# EAGLE board highpass filter (EAGLE 5.00)

Size 160 x 100 mm. Coordinates in mm from the lower left corner, seen from the top.
Outline: 0,0 160,0 160,100 0,100 0,0
Copper layers (1*16): Top 0.035mm / dielectric 1.5mm / Bottom 0.035mm
Design rules "default": minimum track width 10mil, minimum drill 24mil, track to track 8mil, track to pad 8mil, pad to pad 8mil, via to via 8mil, smd to smd 8mil, copper to edge 40mil, drill to drill 8mil, minimum pad ring 10mil, minimum via ring 8mil, stop-mask expansion 4mil, vias tented up to drill 0mil, thermal gap 10mil

## Footprints (pad centres in the part's own frame; a part is rotated, then mirrored left to right if it is on the bottom)
BATTCOM_20MM_PTH = drill 1.3 round: 1 20,0; 2 0,0
C050-030X075 = drill 0.813 octagon: 1 -2.54,0; 2 2.54,0
LED5MM = drill 0.813 pad 1.88 round: A -1.27,0; K 1.27,0
0204/7 = drill 0.813 octagon: 1 -3.81,0; 2 3.81,0
RTRIM3339P = drill 0.61 round: 1 -2.54,0; 2 0,-2.54; 3 2.54,0
TO92 = drill 0.813 octagon: 1 1.27,0; 2 0,1.905; 3 -1.27,0
DIODE-ZENER = drill 0.9 round: P$1 -3.556,0; P$2 3.556,0

## Placement (x,y rotation side)
BAT1  [BATTCOM_20MM_PTH]  -34.93,11.9 0 top  (outside the outline)
C1  [C050-030X075]  -37.47,24.6 0 top  (outside the outline)
C2  [C050-030X075]  -15.88,34.76 0 top  (outside the outline)
LED1  [LED5MM]  -29.85,27.14 0 top  (outside the outline)
R1  [0204/7]  -17.15,41.11 0 top  (outside the outline)
R2  [0204/7]  -27.31,41.11 0 top  (outside the outline)
R3  [0204/7]  -37.47,41.11 0 top  (outside the outline)
R4  [0204/7]  -17.15,44.92 0 top  (outside the outline)
R5  [0204/7]  -27.31,44.92 0 top  (outside the outline)
R6  [RTRIM3339P]  -17.15,27.14 0 top  (outside the outline)
T1  BC547  [TO92]  -29.85,36.03 0 top  (outside the outline)
T2  BC547  [TO92]  -42.55,36.03 0 top  (outside the outline)
U$2  DIODE-ZENERPTH  [DIODE-ZENER]  -37.47,44.92 0 top  (outside the outline)

## Library data of the parts
BAT1 LED1 U$2 = SparkFun
C1 C2 R6 = resistor
R1-R5 = rcl
T1 T2 = transistor

## Nets
N$1: C1.1
N$2: C1.2 C2.1 R2.2
N$3: R1.1
N$4: BAT1.2 R2.1 R5.1 R6.1 T1.1
N$5: C2.2 R6.3
N$6: R6.2 U$2.P$1
N$7: R5.2 T1.2 U$2.P$2
N$8: LED1.K T1.3
N$11: BAT1.1

## Tracks (layer width: path | path; a pad name or v marks a point on that pad's centre or on a via)
N$2  (2 unrouted)
N$4  (4 unrouted)
N$5  (1 unrouted)
N$6  (1 unrouted)
N$7  (2 unrouted)
N$8  (1 unrouted)